# EAGLE board Assessment1_PCB (EAGLE 9.6.2)
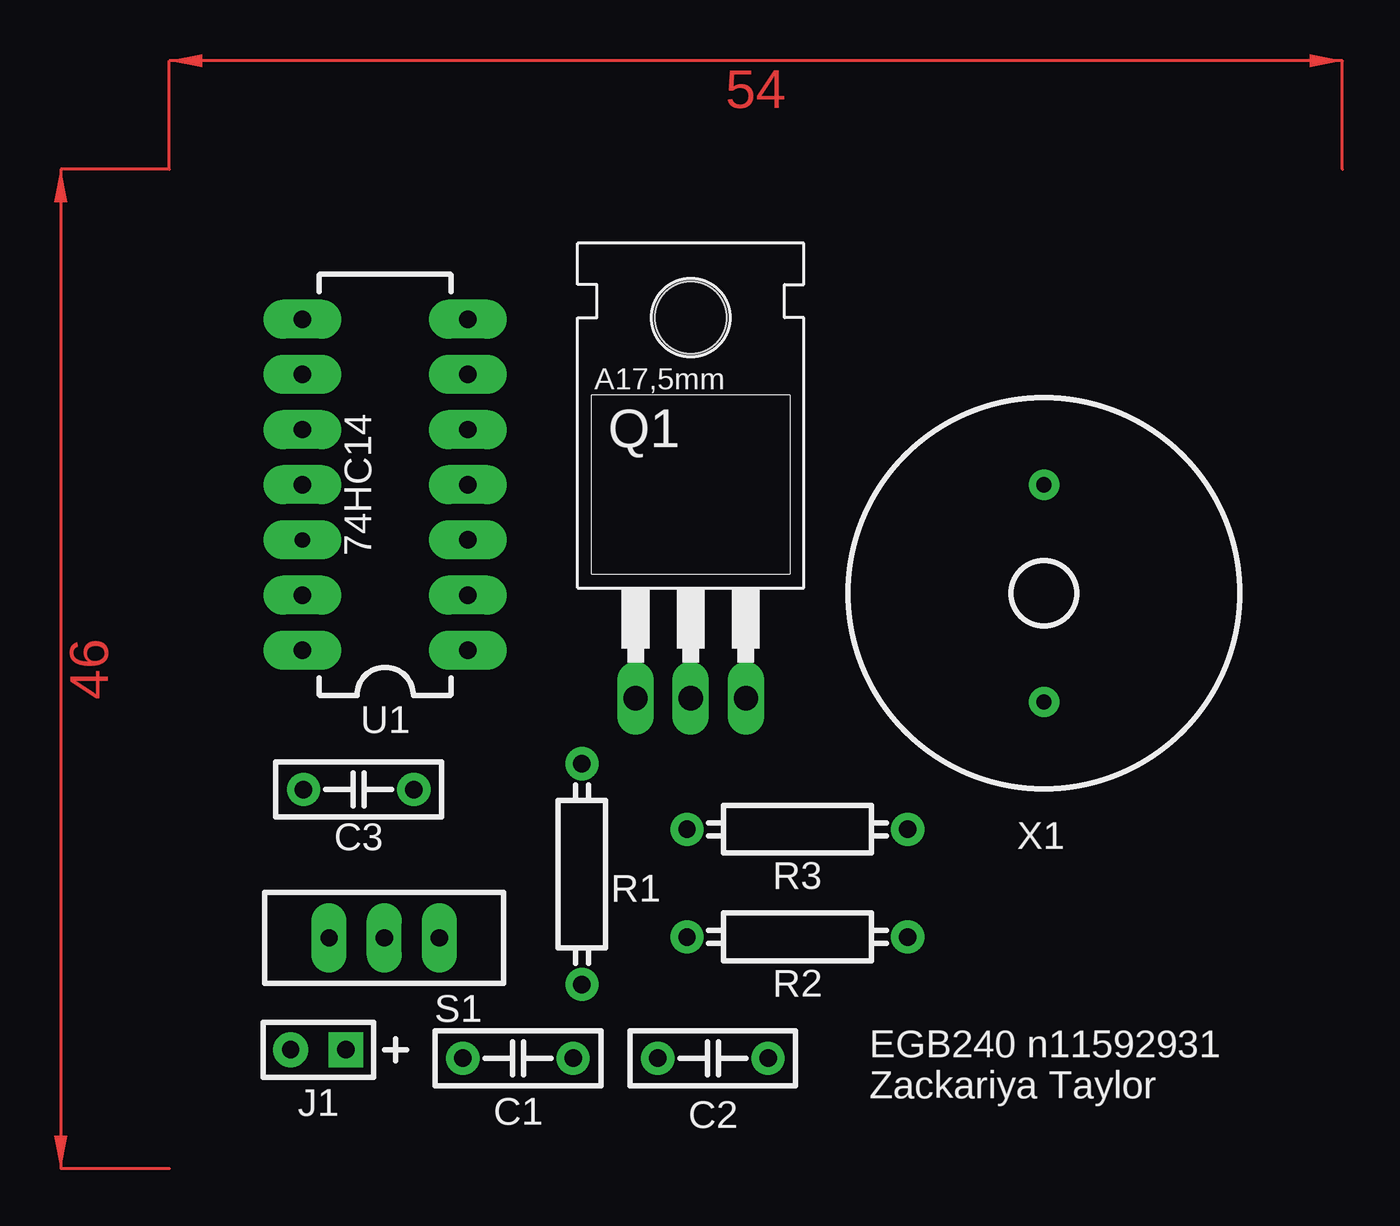
[diagram p0: board, top side]
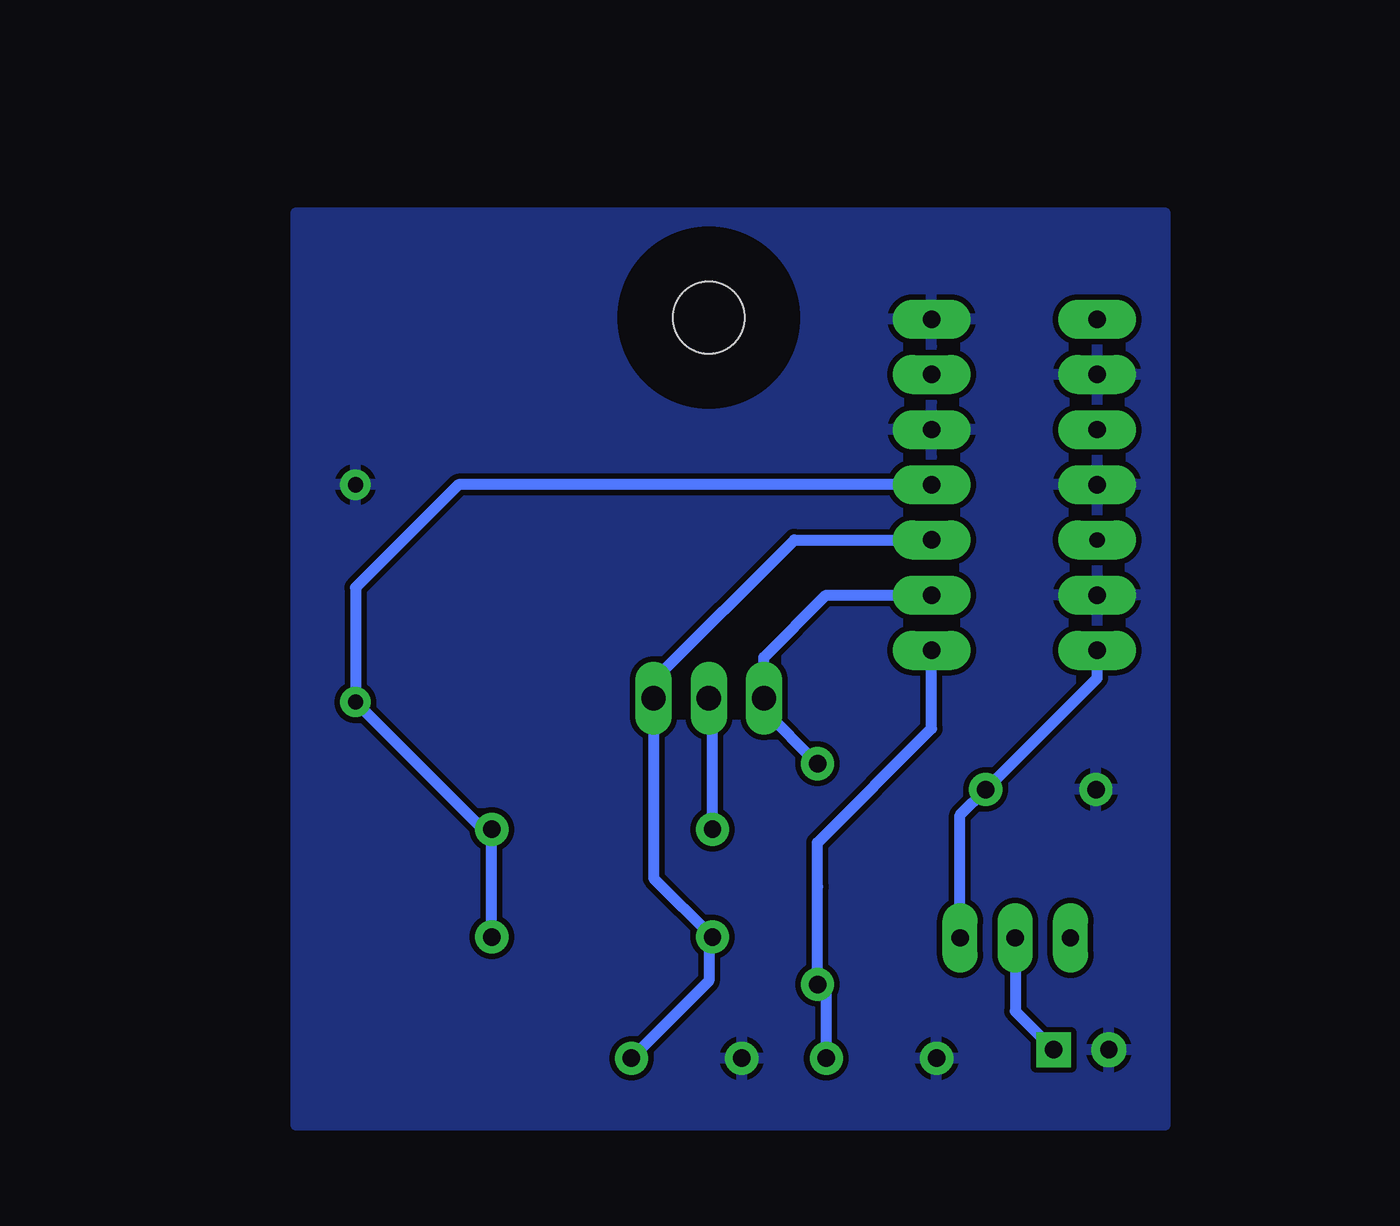
[diagram p1: board, bottom side, seen from below]

No outline drawn. Coordinates in mm, seen from the top.
Copper layers (1*16): Top 0.035mm / dielectric 1.5mm / Bottom 0.035mm
Design rules "default *": minimum track width 10mil, minimum drill 20mil, track to track 10mil, track to pad 10mil, pad to pad 10mil, via to via 10mil, smd to smd 8mil, copper to edge 1mm, drill to drill 20mil, minimum pad ring 10mil, minimum via ring 8mil, stop-mask expansion 4mil, vias tented up to drill 0mil, thermal gap 10mil
bKeepout: 4 lines

## Footprints (pad centres in the part's own frame; a part is rotated, then mirrored left to right if it is on the bottom)
CAP-DISC-P5.08 = drill 0.8 pad 1.524: P$1 -2.54,0; P$2 2.54,0
BATT-3V = drill 0.8 pad 1.6 square: P$1 -1.27,0 | drill 0.8 pad 1.6: P$2 1.27,0
TO220 = drill 1.118 long: 1 -2.54,-6.35; 2 0,-6.35; 3 2.54,-6.35 | hole 3.302: 0,11.176
AXIAL-P10.16 = drill 0.8 pad 1.524: P$1 -5.08,0; P$2 5.08,0
SS-12 = drill 0.8 pad 1.6 long: 1 0,2.54; 2 0,0; 3 0,-2.54
DIP-14 = drill 0.8 pad 1.8 long: P$1 -3.81,7.62; P$2 -3.81,5.08; P$3 -3.81,2.54; P$4 -3.81,0; P$5 -3.81,-2.54; P$6 -3.81,-5.08; P$7 -3.81,-7.62; P$8 3.81,-7.62; P$9 3.81,-5.08; P$10 3.81,-2.54; P$11 3.81,0; P$13 3.81,5.08; P$14 3.81,7.62 | drill 0.7 pad 1.8 long: P$12 3.81,2.54
PS1720P02 = drill 0.7 pad 1.4: P$1 -5,0; P$2 5,0

## Placement (x,y rotation side)
C1  120n  [CAP-DISC-P5.08]  15.05,5.08 180 top
C2  120n  [CAP-DISC-P5.08]  24.02,5.08 180 top
C3  120n  [CAP-DISC-P5.08]  7.71,17.45 180 top
J1  2xAA  [BATT-3V]  5.85,5.47 180 top
Q1  IRF540  [TO220]  23,28 0 top
R1  3M3  [AXIAL-P10.16]  17.99,13.56 90 top
R2  2.2k  [AXIAL-P10.16]  27.91,10.66 0 top
R3  3.3k  [AXIAL-P10.16]  27.91,15.62 0 top
S1  [SS-12]  8.89,10.62 90 top
U1  74HC14  [DIP-14]  8.93,31.48 180 top
X1  pss  [PS1720P02]  39.26,26.48 90 top

## Library data of the parts
C1-C3 J1 R1-R3 S1 U1 X1 = EGB240
Q1 = transistor-fet

## Nets
+3V: C3.P$1 S1.3 U1.P$14
GND: C1.P$2 C2.P$2 C3.P$2 J1.P$2 U1.P$5 U1.P$7 U1.P$9 U1.P$11 U1.P$13 X1.P$2
N$1: C1.P$1 R1.P$1 U1.P$1
N$2: Q1.1 R1.P$2 U1.P$2
N$3: C2.P$1 Q1.3 R2.P$1 U1.P$3
N$4: R2.P$2 R3.P$2 U1.P$4 X1.P$1
N$5: J1.P$1 S1.2
N$7: Q1.2 R3.P$1

## Tracks (layer width: path | path; a pad name or v marks a point on that pad's centre or on a via)
+3V
  Bottom 0.508: S1.3 11.43,16.27 C3.P$1 5.12,22.58 U1.P$14
GND
  pour Bottom: 2,44 2,2 42,2 42,44
N$1
  Bottom 0.508: U1.P$1 12.74,20.26 18,15 18,13 17.99,12.99 R1.P$1 17.59,8.08 C1.P$1
N$2
  Bottom 0.508: R1.P$2 20.46,21.11 Q1.1 20.46,23.54 17.6,26.4 U1.P$2
N$3
  Bottom 0.508: U1.P$3 19.06,28.94 25.54,22.46 Q1.3 25.54,13.37 R2.P$1 23,10.49 23,8.64 C2.P$1
N$4
  Bottom 0.508: R2.P$2 R3.P$2 33.4,15.62 X1.P$1 39.26,26.74 34.52,31.48 U1.P$4
N$5
  Bottom 0.508: S1.2 8.89,7.24 J1.P$1
N$7
  Bottom 0.508: R3.P$1 22.83,21.48 Q1.2
(copper drawn outside any net)
  shapes: Top area x2

## Text on the board
tPlace: EGB240 n11592931 / Zackariya Taylor